# Altium PCB water_level_v3.PcbDoc
Units mil, origin at the board's own origin, x right, y up, seen from the top; angles counter-clockwise.
Board outline 4724.41 x 2755.91 mil, 2 copper layers (Top Layer, Bottom Layer), stack 62.205 mil thick; 38 components, 53 nets, 176 pads, 136 vias.
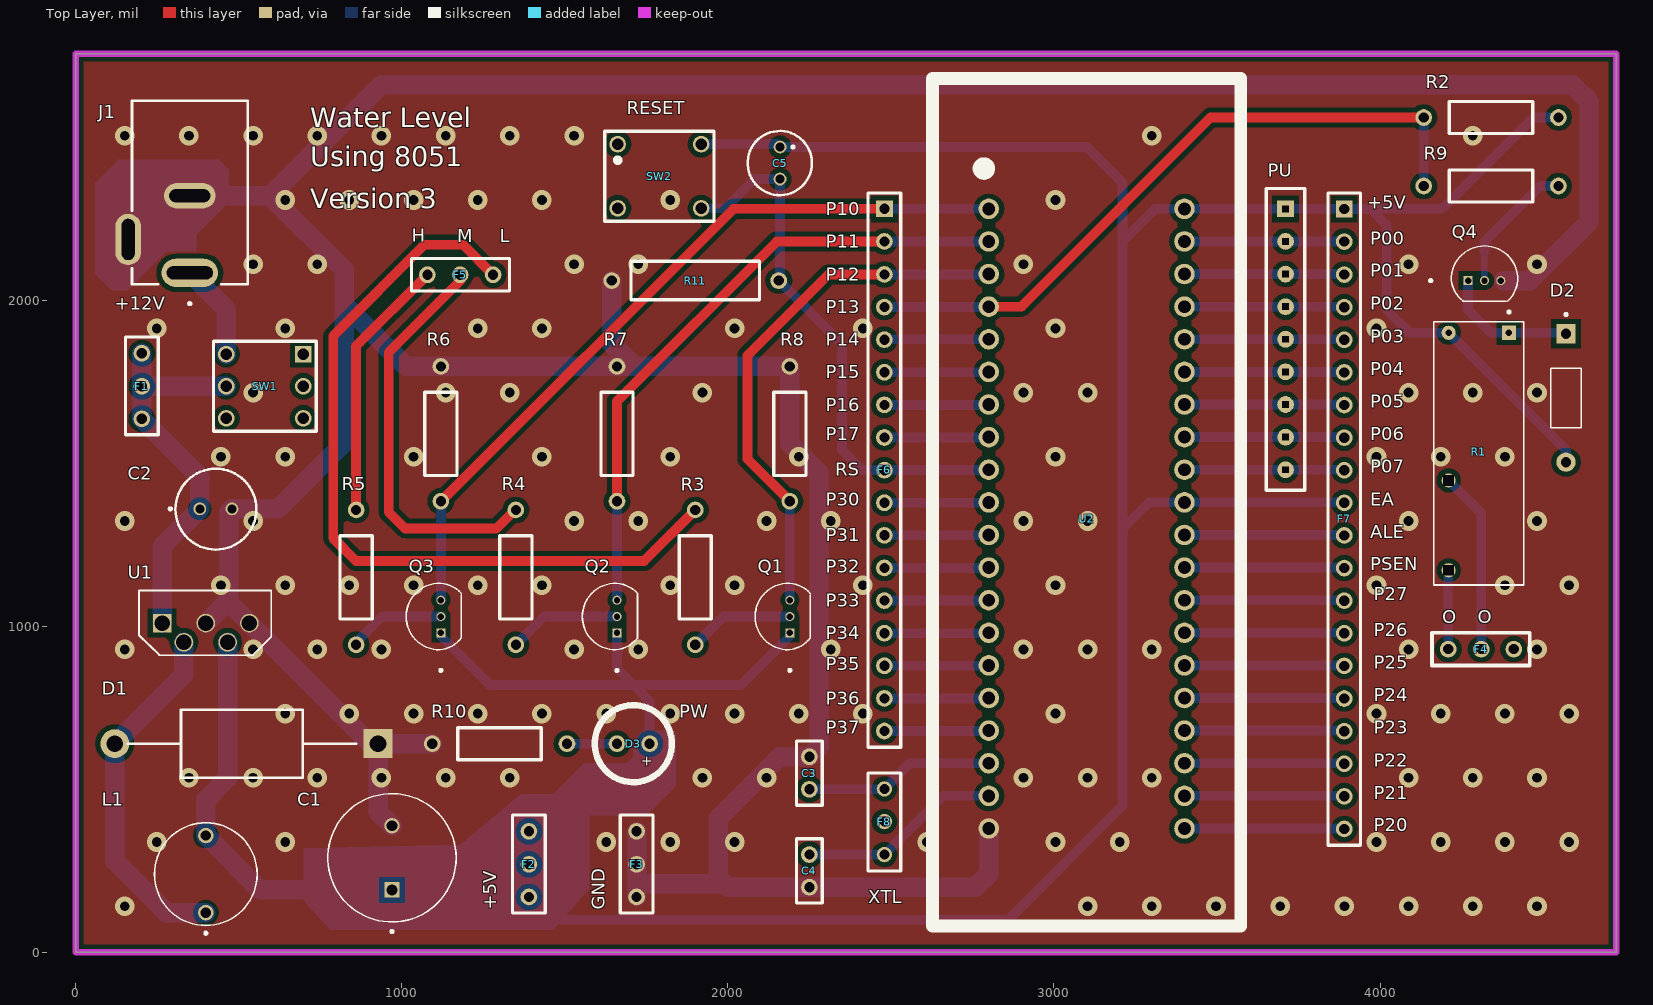
[diagram p0: Top Layer view]
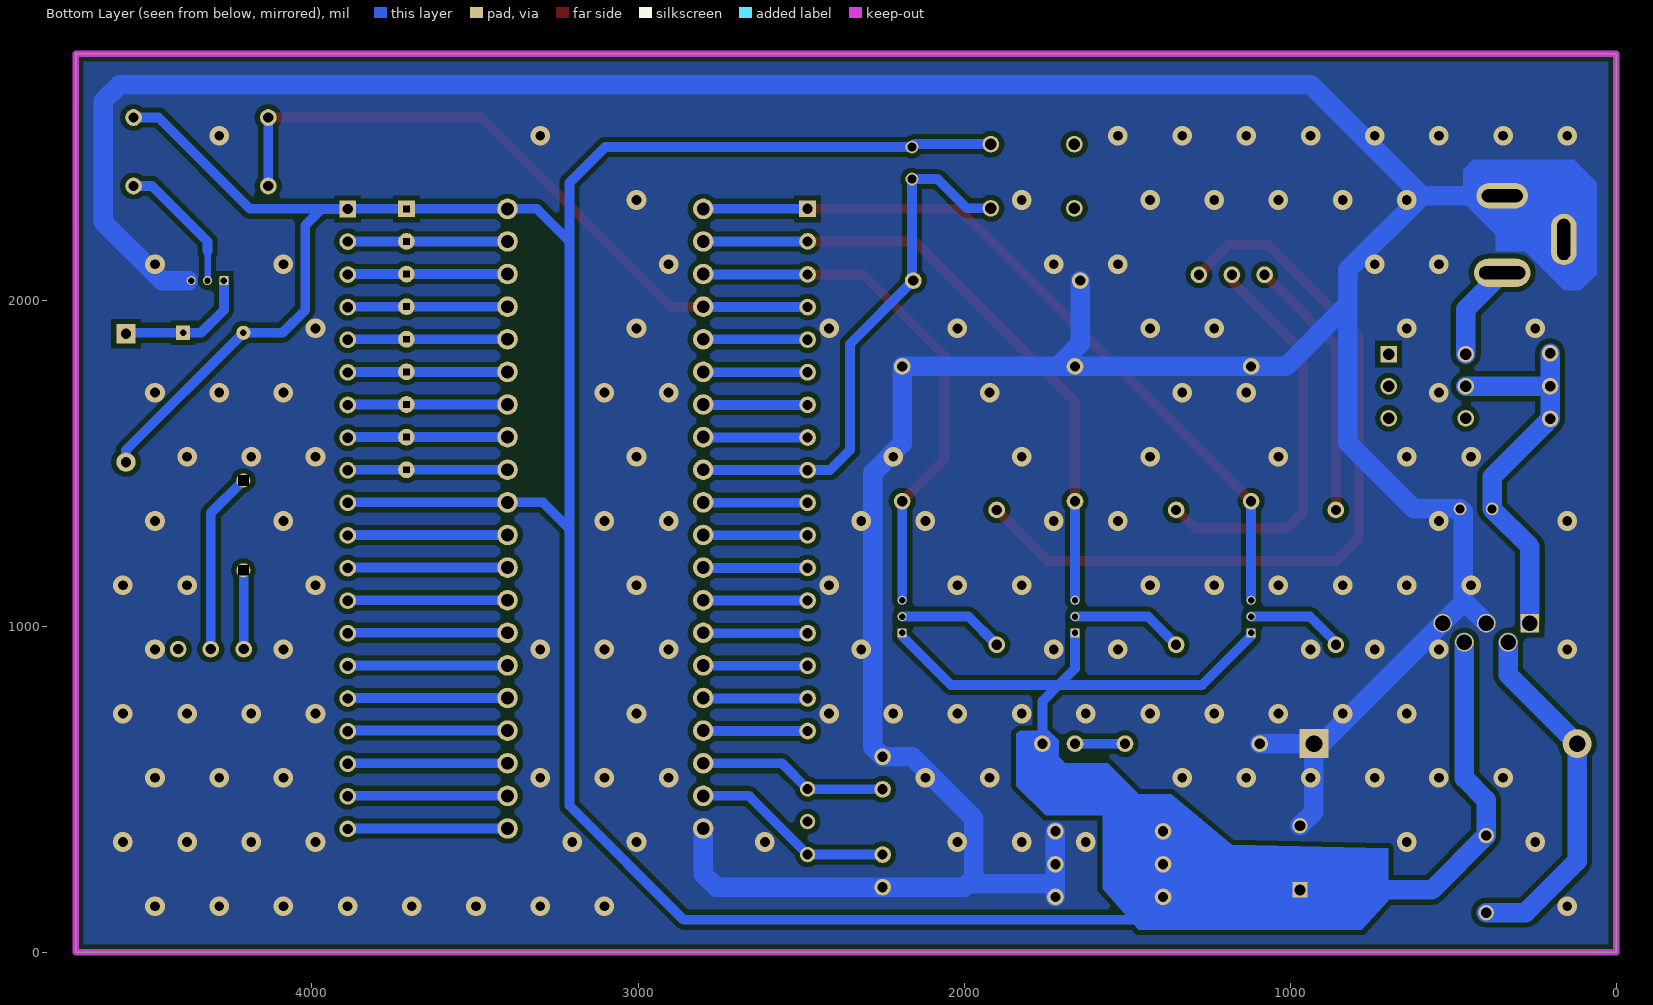
[diagram p1: Bottom Layer view, seen from below]

## Layer stack, top to bottom
Top Solder: solder mask 0.3937, Solder Resist, Dk 3.5
Top Layer: signal copper 1.378
Dielectric 1: dielectric 59.4488, FR-4, Dk 4.8
Bottom Layer: signal copper 1.378
Bottom Solder: solder mask 0.3937, Solder Resist, Dk 3.5

## Board outline
0,0 4724.41,0 4724.41,2755.91 0,2755.91

## Design rules (kind name [scope] priority, off if disabled: settings)
Clearance [All] p1: gap=15 ignorepadtopadclearanceinfootprint=FALSE except(19.68: THPad-THPad)
HoleSize [All] p1: absolutevalues=TRUE maxlimit=150 minlimit=1 maxpercent=80.000 minpercent=20.000
PolygonConnect [All] p1: connectstyle=Direct reliefconductorwidth=10 reliefentries=4 polygonreliefangle="90 Angle" airgapwidth=10
RoutingVias [All] p1: holewidth=30 width=100 viastyle="Through Hole" minholewidth=11.81 minwidth=19.68 maxholewidth=248.03 maxwidth=50
SilkToSolderMaskClearance [IsPad] p1 off: minsilkscreentomaskgap=2 clearancetoexposedcopper=TRUE
SolderMaskExpansion [All] p1: expansion=4 istentingtop=FALSE
Width [All] p1: maxlimit=70 minlimit=10 preferedwidth=60
28 further rules are at their usual default settings.

## Classes and differential pairs
component class water_level_v3: C1 C2 D1 D2 F1 F2 F3 F4 F5 J1 L1 Q1 Q2 Q3 Q4 R1 R2 R3 R4 R5 R6 R7 R8 R9 SW1 U1
component class Mcu_at89s52: C3 C4 C5 D3 F6 F7 F8 PU R10 R11 SW2 U2

## Components (designator, comment, footprint, x,y, rotation, side; value= is the part's Value field where it differs from the comment)
C1 "1000uF 25V" "Capacitor 1000uF 25V" 970,290 r90 top
C2 "100uF" "Capacitor 100uF 35V" 430,1360 r0 top
C3 "30pf" CAP_30pF 2250,550 r270 top
C4 "30pf" CAP_30pF 2250,250 r270 top
C5 "Capacitor 10uF" "Capacitor 10uF 50V" 2160,2420.43 r270 top
D1 "1N5822" "Diode 1N5822" 510,640 r180 top
D2 "1N4007" 1N4007 4570,1700 r270 top
D3 "Red" "LED - 3mm" 1710,640 r180 top
F1 "+12V_DC" "Fence 3pin" 203.07,1687.24 r90 top
F2 "+5V_DC" "Fence 3pin" 1390,221.18 r90 top
F3 "GND_" "Fence 3pin" 1720,221.18 r90 top
F4 "Fence 3 pin" "MALE HEADER 3PIN" 4358.82,930 r180 top
F5 "Pin_water" "Fence 3pin" 1130,2077.87 r0 top
F6 "Fence 17 PIN" "Fence 17PIN" 2480,1528.82 r270 top
F7 "Fence 20 pin" "Fence 20PIN" 3890,1378.48 r270 top
F8 "Fence 3 pin" "Fence 3pin_female" 2480,450 r270 top
J1 "DCJ200-10-A-XX-K_REVA" GCT_DCJ200-10-A-XX-K_REVA 350,2320 r180 top
L1 "100uH" Inductor 399.21,240 r90 top
PU "8x10kOhm" RES_10K_PACK_9PIN 3710,1880 r270 top (schematic designator RP1)
Q1 "2N2222A" 2N2222 2190,1029.8 r90 top
Q2 "2N2222A" 2N2222 1660,1029.8 r90 top
Q3 "2N2222A" 2N2222 1120,1029.8 r90 top
Q4 "2N2222A" 2N2222 4320,2060 r0 top
R1 "Relay" Relay 4302.52,1527.95 r270 top
R2 "1k" "RESISTOR 1W" 4340.2,2560 r0 top
R3 "1k" "RESISTOR 1W" 1900,1150 r270 top
R4 "1k" "RESISTOR 1W" 1350,1150 r270 top
R5 "1k" "RESISTOR 1W" 860,1150 r270 top
R6 "1k" "RESISTOR 1W" 1120,1590 r270 top
R7 "1k" "RESISTOR 1W" 1660,1590 r270 top
R8 "1k" "RESISTOR 1W" 2190,1590 r270 top
R9 "1k" "RESISTOR 1W" 4340.2,2350 r180 top
R10 "1k" "RESISTOR 1W" 1300,640 r180 top
R11 "10k" "RESISTOR 10k_0.5W" 1900,2060 r0 top
SW1 "Push_sw 8x8mm 6pin" "PUSH_SW 6PIN" 580,1736.06 r270 top
SW2 "Sw_4pin" SW_4PIN 1790,2380 r0 top
U1 "LM2576T-5V" LM2596T-5V 399.06,1009.8 r0 top
U2 "Ic_socket_40pin_2.54mm" IC_SOKET_40PIN 3100,1380 r0 top

## Footprints (in the part's own frame and the unit in brackets; to place one, negate y for a bottom-side part, rotate by r counter-clockwise, add the part's x,y. Pads: shape width x height; smd on the part's side, far side on the other; paste and mask are expansions set on the pad)
1N4007 [mm] "Diode 1N4007 1A 1000V DIP"
  rect 1.5x1.5 hole 0.8: 1(-5,0)
  round 1.5 hole 0.8: 2(5,0)
  silkscreen extent -6.6,-1.18 2.32,1.18, body extent -5.47,-1.35 5.47,1.35, height 4.19
2N2222 [mm]
  rect 0.7x0.7 hole 0.5: 1(-1.275,0)
  round 0.7 hole 0.5: 2(0,0) 3(1.275,0)
  silkscreen extent -4.29,-1.6 2.59,2.7, body extent -2.6,-1.5 2.6,2.69, height 5.33
CAP_30pF [mm] "ceramic 50V"
  round 1.3 hole 0.8: 1(-1.27,0) 2(1.27,0)
  silkscreen extent -2.5,-1 2.5,1, body extent -1.8,-1.25 1.8,1.25, height 5
"Capacitor 10uF 50V" [mm] "pin2mmd5mmx11mm"
  round 1 hole 0.7: 1(-1.25,0) 2(1.25,0)
  silkscreen extent -2.5,-2.52 2.5,2.47, body extent -2.5,-2.5 2.5,2.5, height 12
"Capacitor 100uF 35V" [mm]
  round 1 hole 0.7: 1(-1.25,0) 2(1.25,0)
  silkscreen extent -3.65,-3.17 3.15,3.12, body extent -3.15,-3.17 3.15,3.12, height 17
"Capacitor 1000uF 25V" [mm] "T? hóa 1000uF 25V / Kích thu?c 10x17mm"
  rect 1.2x1.2 hole 0.85: 1(-2.5,0)
  round 1.2 hole 0.85: 2(2.5,0)
  silkscreen extent -5.85,-5 5,5, body extent -4.99,-5 5,5, height 12.5
"Diode 1N5822" [mm] "1N5822 Diode Schottky 40V 3A DO-201AD"
  rect 2.25x2.25 hole 1.3: 1(-10.6,0)
  round 2.25 hole 1.3: 2(9.9,0)
  silkscreen extent -8.89,-2.65 8.89,2.65, body extent -10.83,-2.65 10.32,2.65, height 17
"Fence 3pin" [mm] "Hang rao male 6 chan"
  round 1.3 hole 0.8: 1(-1.3,0) 2(1.24,0) 3(3.81,0)
  silkscreen extent -2.54,-1.27 5.08,1.27, body extent -2.77,-1.27 5.17,1.3, height 9.18
"Fence 3pin_female" [mm] "Hang rao male 6 2.54mm"
  round 1.2 hole 0.8: 1(-1.3,0) 2(1.24,0) 3(3.81,0)
  silkscreen extent -2.54,-1.27 5.08,1.27, body extent -2.79,-1.23 5.33,1.27, height 5
"Fence 17PIN" [mm] "Hang rao male 20 chan"
  rect 1.3x1.3 hole 0.8: 1(-19.08,0)
  round 1.3 hole 0.8: 2(-16.54,0) 3(-13.97,0) 4(-11.43,0) 5(-8.89,0) 6(-6.35,0) 7(-3.81,0) 8(-1.27,0) 9(1.27,0) 10(3.81,0) 11(6.35,0) 12(8.89,0) 13(11.43,0) 14(13.97,0) 15(16.51,0) 16(19.05,0) 17(21.59,0)
  silkscreen extent -20.32,-1.27 22.86,1.27, body extent -20.55,-1.27 22.96,1.3, height 9.18
"Fence 20PIN" [mm] "Hang rao male 20 chan"
  rect 1.3x1.3 hole 0.8: 1(-22.89,0)
  round 1.3 hole 0.8: 2(-20.35,0) 3(-17.78,0) 4(-15.24,0) 5(-12.7,0) 6(-10.16,0) 7(-7.62,0) 8(-5.08,0) 9(-2.54,0) 10(0,0) 11(2.54,0) 12(5.08,0) 13(7.62,0) 14(10.16,0) 15(12.7,0) 16(15.24,0) 17(17.78,0) 18(20.32,0) 19(22.86,0) 20(25.4,0)
  silkscreen extent -24.13,-1.27 26.67,1.27, body extent -24.36,-1.27 26.77,1.3, height 9.18
GCT_DCJ200-10-A-XX-K_REVA [mm]
  oval 2x4 hole 1 slot 3.2 at 90 deg: 2(4.8,3.4)
  oval 4x2 hole 1 slot 3.2 at 0 deg: 3(0,0)
  oval 4.4x2.2 hole 1 slot 3.6 at 0 deg: 4(0,6)
  silkscreen extent -4.5,-7.4 4.5,8.5, body extent -4.5,-7.4 5.05,6.9, height 11
IC_SOKET_40PIN [mm] "2.54mm"
  round 1.6 hole 1: 1(-7.62,22.86) 2(-7.62,20.32) 3(-7.62,17.78) 4(-7.62,15.24) 5(-7.62,12.7) 6(-7.62,10.16) 7(-7.62,7.62) 8(-7.62,5.08) 9(-7.62,2.54) 10(-7.62,0) 11(-7.62,-2.54) 12(-7.62,-5.08) 13(-7.62,-7.62) 14(-7.62,-10.16) 15(-7.62,-12.7) 16(-7.62,-15.24) 17(-7.62,-17.78) 18(-7.62,-20.32) 19(-7.62,-22.86) 20(-7.62,-25.4) 21(7.62,-25.4) 22(7.62,-22.86) 23(7.62,-20.32) 24(7.62,-17.78) 25(7.62,-15.24) 26(7.62,-12.7) 27(7.62,-10.16) 28(7.62,-7.62) 29(7.62,-5.08) 30(7.62,-2.54) 31(7.62,0) 32(7.62,2.54) 33(7.62,5.08) 34(7.62,7.62) 35(7.62,10.16) 36(7.62,12.7) 37(7.62,15.24) 38(7.62,17.78) 39(7.62,20.32) 40(7.62,22.86)
  silkscreen extent -12,-33 12,33, body extent -8.85,-27.15 8.85,25.11, height 8.11
Inductor [mm] "Cu?n c?m 100uH 08108x10mm / Mô hình 3D ch? mang tính ch?t tu?ng trung do không tìm du?c mô hình phù h?p"
  round 1.2 hole 0.8: 1(-3,0) 2(3,0)
  silkscreen extent -4.7,-4 4,4, body extent -3.9,-7.79 4.11,7.57, height 2.01
"LED - 3mm" [mm]
  round 1.3 hole 0.8: 1(-1.27,0) 2(1.27,0)
  silkscreen extent -3,-3 3,3, body extent -1.82,-1.95 1.58,1.95, height 5.95
LM2596T-5V [mm]
  rect 1.45x1.45 hole 1.2: 1(-3.4,0)
  round 1.45 hole 1.2: 2(-1.7,-1.5) 3(0,0) 4(1.7,-1.5) 5(3.4,0)
  silkscreen extent -5.2,-2.52 5.1,2.52, body extent -5.12,-1.9 5.12,2.55, height 15.11
"MALE HEADER 3PIN" [mm] "2.54mm"
  round 1.3 hole 0.8: 1(-1.3,0) 2(1.24,0) 3(3.81,0)
  silkscreen extent -2.54,-1.27 5.08,1.27, body extent -2.77,-1.27 5.17,1.3, height 9.18
"PUSH_SW 6PIN" [mm] "8X8MM"
  rect 1.3x1.3 hole 0.9: 1(-2.5,3)
  round 1.3 hole 0.9: 2(0,3) 3(2.5,3) 4(-2.5,-3) 5(0,-3) 6(2.5,-3)
  silkscreen extent -3.5,-4 3.5,4, body extent -4,-4 4,4, height 13.6
Relay [mm] "Relay 5V5A HF46F-G 5-HS1 c?a Hongfa. / V? d?a trên HF46F/005-HS1F(610) c?a Hongfa"
  rect 1.1x1.1 hole 0.5: 1(-9.45,2.35)
  round 1.1 hole 0.5: 2(-9.45,-2.35)
  round 1.1 hole 0.8 square: 3(2.05,-2.35) 4(9.05,-2.35)
  silkscreen extent -11.17,-3.5 10.2,3.5, body extent -10.4,-3.51 10,3.5, height 14.79
RES_10K_PACK_9PIN [mm] "2.54mm"
  rect 1.3x1.3 hole 0.5 square: 1(-10.16,0)
  round 1.3 hole 0.5 square: 2(-7.62,0) 3(-5.08,0) 4(-2.54,0) 5(0,0) 6(2.54,0) 7(5.08,0) 8(7.62,0) 9(10.16,0)
  silkscreen extent -11.75,-1.5 11.75,1.5, body extent -11.5,-1.24 13.85,1.24, height 4.95
"RESISTOR 1W" [mm] "1k Ohm"
  round 1.3 hole 0.8: 1(-5.25,0) 2(5.25,0)
  silkscreen extent -3.25,-1.25 3.25,1.25, body extent -5.45,-1.2 5.35,1.2, height 3.2
"RESISTOR 10k_0.5W" [mm] "10k Ohm"
  round 1.3 hole 0.8: 1(-6.5,0) 2(6.5,0)
  silkscreen extent -5,-1.5 5,1.5, body extent -6.6,-1.5 6.6,1.5, height 3.5
SW_4PIN [mm] "6X6mm"
  round 1.3 hole 0.9: 1(-3.25,2.5) 2(3.25,2.5) 3(-3.25,-2.5) 4(3.25,-2.5)
  silkscreen extent -4.25,-3.5 4.25,3.5, body extent -3.78,-2.76 3.78,3.25, height 6

## Part data
C1: library part "Capacitor 1000uF 25V", "T? hóa 1000uF 25V / Kích thu?c 10x17mm", Package=None, Availability=Unavailable, MF="{'manufacturer': u'Panasonic'}", MP=EEUTA1V101, Price=None
C2: library part "Capacitor 100uF", "T? hóa 100uF 35V"
C3 C4: library part "Capacitor 33pf", "T? hóa 33pf 50V"
C5: "T? hóa 10uF 55V"
D1: library part "Diode 1N5822", "1N5822 Diode Schottky 40V 3A DO-201AD / (Through hole)"
D2: "Diode 1N4007 1A 1000V DIP"
D3: library part LED, "LED 5mm"
F1 F2 F3 F5: library part "Fence 3 pin", "hàng rào male 6 chân"
F4 F8: "hàng rào male 6 chân"
J1: "Power Barrel Connector Jack 2.05mm ID (0.081), 5.50mm OD (0.217) Through Hole, Right Angle", Package=None, Check_prices=https://www.snapeda.com/parts/DCJ200-10-A-K1-K/Global+Connector+Technology/view-part/?ref=eda, MF="Global Connector Technology", MP=DCJ200-10-A-K1-K, SnapEDA_Link=https://www.snapeda.com/parts/DCJ200-10-A-K1-K/Global+Connector+Technology/view-part/?ref=snap
L1: library part Inductor, "Cu?n c?m 100uH 0810 8x15mm"
PU: library part Resistor_pack_9pin
Q1 Q2 Q3 Q4: Package=None, Availability=Unavailable, MF="{'manufacturer': u'Diotec Semiconductor'}", MP=2N2222A, Price=None
R1: "Relay 5V5A HF46F-G 5-HS1 c?a Hongfa. / V? d?a trên HF46F/005-HS1F(610) c?a Hongfa"
R2 R3 R4 R5 R6 R7 R8 R9 R10 R11: library part Resistor, "dien tro"
SW1: "6pin free 1-3.4-6 push 2-3,4-5"
U1: library part LM2596T-5V, "IC, STEP-DOWN VOLTAGE REGULATOR", Package=None, Availability=Unavailable, MF="{'manufacturer': u'Texas Instruments'}", MP=LM2596T-12, Price=None

## Via types
v1: diameter 60, hole 30, Top Layer to Bottom Layer, tented both sides, 136 vias

## Nets (pads, with @x,y where several pads share a name; then routed paths per layer and width w, separated by ;. In a path a pad name is that pad's centre, name@x,y a point inside that pad or via, vN(x,y) a via of type N, cw(c..) or ccw(c..) an arc to the next point about the centre after c; other vN are vias at no path point)
+5V: C1.1 C5.1 D2.2 D3.1 F2.1 F2.2 F2.3 F7.1 F7.10 L1.2 PU.1 Q1.1 Q2.1 Q3.1 R1.2 R2.2 SW2.2 U1.4 U2.31 U2.40 | length 11433.5
  Bottom Layer w30: Q3.1 1120,970 1270,820 1710,820 ; 1440,100 1505,100 2860,100 3210,450 3210,1298.82 ; 1440,430 1450,440 ; Q2.1 1660,870 1710,820 ; D3.1@1750,650 D3.1 1760,770 1710,820 ; SW2.2 2151.22,2478.43 C5.1 3100.35,2469.65 3210,2360 3210,2180 ; Q1.1 2190,970 2040,820 1710,820 ; F7.10 3888.48,1380 U2.31 3291.18,1380 3210,1298.82 ; R2.2 4470,2560 4190,2280 F7.1@3889.66,2280 ; D2.2 4570,1540 R1.2 4090,1900 4020,1970 4020,2230 3970.34,2279.66 F7.1 F7.1@3889.66,2280 ; 3210,1298.82 3210,2180 ; 3210,2180 3310,2280 U2.40 PU.1 F7.1@3889.66,2280
  Bottom Layer w60: U1.4 465.98,534.09 399.21,467.32 L1.2 565.75,191.57 C1.1
+12V: C2.1 F1.1 F1.2 F1.3 SW1.5 U1.1 | length 1207.8
  Bottom Layer w60: F1.3 F1.2 ; U1.1 265.2,1244.41 C2.1 380.79,1458.35 F1.1 F1.2 ; SW1.5 F1.2
ALE: F7.11 U2.30 | length 490.6
  Bottom Layer w30: U2.30 3888.48,1280 F7.11
GND: C1.2 C2.2 C3.1 C4.2 D1.1 F3.1 F3.2 F3.3 J1.2 J1.3 Q4.3 R6.1 R7.1 R8.1 R10.2 R11.1 U1.3 U1.5 U2.20 | length 12873.4
  Bottom Layer w60: J1.3 596.69,2320 ; U1.3 470,1080.75 470,1350.79 C2.2 620,1360 823.94,1563.94 823.94,1986.06 ; 479.21,1063.5 U1.5 902.72,640 D1.1 ; C1.2 927.32,431.1 D1.1 ; R10.2 D1.1 ; R11.1 1644.09,1865.91 1710,1800 1710,1796.69 ; F3.1 1720,200 ; F3.3 F3.2 1720,200 ; U2.20 2800,240 2760,200 C4.2 2000,200 1990,210 ; Q4.3@4378.78,2060 4460,2060 4640,2240 4640,2610 4590,2660 936.69,2660 596.69,2320 ; 596.69,2320 823.94,2092.76 823.94,1986.06 ; 823.94,1986.06 1013.31,1796.69 R6.1 R7.1 1710,1796.69 ; 1710,1796.69 R8.1 2190,1560 2280,1470 2280,630 C3.1 2160,600 1970,410 1970,230 1990,210 ; 1720,200 1730,210 1990,210
  other v1: 150.35,141.65 3103.11,141.65 3299.96,141.65 3496.81,141.65 3693.66,141.65 3890.51,141.65 4087.36,141.65 4284.21,141.65 4481.06,141.65 248.78,338.5 642.48,338.5 1626.73,338.5 1823.58,338.5 2020.43,338.5 2610.98,338.5 3004.69,338.5 3201.54,338.5 3988.94,338.5 4185.79,338.5 4382.64,338.5 4579.49,338.5 347.2,535.35 544.06,535.35 740.91,535.35 937.76,535.35 1134.61,535.35 1331.46,535.35 1922.01,535.35 2118.86,535.35 2906.26,535.35 3103.11,535.35 3299.96,535.35 4087.36,535.35 4284.21,535.35 4481.06,535.35 642.48,732.2 839.33,732.2 1036.18,732.2 1233.03,732.2 1429.88,732.2 1626.73,732.2 1823.58,732.2 2020.43,732.2 2217.28,732.2 2414.13,732.2 3004.69,732.2 3988.94,732.2 4185.79,732.2 4382.64,732.2 4579.49,732.2 150.35,929.06 544.06,929.06 740.91,929.06 937.76,929.06 1528.31,929.06 1725.16,929.06 2315.71,929.06 2906.26,929.06 3103.11,929.06 3299.96,929.06 4087.36,929.06 4481.06,929.06 445.63,1125.91 642.48,1125.91 839.33,1125.91 1036.18,1125.91 1233.03,1125.91 1429.88,1125.91 1823.58,1125.91 2020.43,1125.91 2414.13,1125.91 3004.69,1125.91 3988.94,1125.91 4382.64,1125.91 4579.49,1125.91 150.35,1322.76 544.06,1322.76 1528.31,1322.76 1725.16,1322.76 2118.86,1322.76 2315.71,1322.76 2906.26,1322.76 3103.11,1322.76 4087.36,1322.76 4481.06,1322.76 445.63,1519.61 642.48,1519.61 1036.18,1519.61 1429.88,1519.61 1823.58,1519.61 2217.28,1519.61 3004.69,1519.61 3988.94,1519.61 4185.79,1519.61 4382.64,1519.61 544.06,1716.46 1134.61,1716.46 1331.46,1716.46 1922.01,1716.46 2906.26,1716.46 3103.11,1716.46 4087.36,1716.46 4284.21,1716.46 4481.06,1716.46 248.78,1913.31 642.48,1913.31 1233.03,1913.31 1429.88,1913.31 2020.43,1913.31 2414.13,1913.31 3004.69,1913.31 3988.94,1913.31 544.06,2110.16 740.91,2110.16 1528.31,2110.16 1725.16,2110.16 2906.26,2110.16 4087.36,2110.16 4481.06,2110.16 642.48,2307.01 839.33,2307.01 1036.18,2307.01 1233.03,2307.01 1429.88,2307.01 1823.58,2307.01 3004.69,2307.01 150.35,2503.86 347.2,2503.86 544.06,2503.86 740.91,2503.86 937.76,2503.86 1134.61,2503.86 1331.46,2503.86 1528.31,2503.86 3299.96,2503.86 4284.21,2503.86
NetC3_2: C3.2 F8.1 U2.18 | length 583.1
  Bottom Layer w30: C3.2 2478.82,500 F8.1 2558.82,580 U2.18
NetC4_1: C4.1 F8.3 U2.19 | length 624.6
  Bottom Layer w30: C4.1 F8.3 2660,480 U2.19
NetD1_2: D1.2 L1.1 U1.2 | length 1103.1
  Bottom Layer w60: U1.2 332.13,851.89 D1.2 120.24,279.76 278.11,121.89 L1.1
NetD2_1: D2.1 Q4.1 R1.1 | length 420.4
  Bottom Layer w30: Q4.1 4269.8,1970.2 4340,1900 R1.1 4566.85,1900 D2.1
NetD3_2: D3.2 R10.1 | length 153.3
  Bottom Layer w30: R10.1 D3.2
NetF5_1: F5.1 R5.1 | length 820.9
  Top Layer w30: R5.1 860,1859.06 F5.1 F5.1@1078.82,2068.82
NetF5_2: F5.2 R4.1 | length 1252.7
  Top Layer w30: F5.2 1178.82,2058.82 960,1840 960,1350 1010,1300 1290,1300 1346.69,1356.69 R4.1
NetF5_3: F5.3 R3.1 | length 2468
  Top Layer w30: F5.3 1187.87,2170 1070,2170 790,1890 790,1270 860,1200 1743.31,1200 R3.1
NetJ1_4: J1.4 SW1.4 | length 295.6
  Bottom Layer w60: J1.4 461.89,1971.89 SW1.4
NetQ1_2: Q1.2 R3.2 | length 325.8
  Bottom Layer w30: R3.2 1986.5,1029.8 Q1.2
NetQ2_2: Q2.2 R4.2 | length 345.8
  Bottom Layer w30: R4.2 1436.5,1029.8 Q2.2
NetQ3_2: Q3.2 R5.2 | length 299.7
  Bottom Layer w30: R5.2 860,950 939.8,1029.8 Q3.2
NetQ4_2: Q4.2 R9.1 | length 417.1
  Bottom Layer w20: Q4.2 4320,2150
  Bottom Layer w30: 4320,2150 4320,2179.66 4490.34,2350 R9.1
P00: F7.2 PU.2 U2.39 | length 503.8
  Bottom Layer w30: U2.39 PU.2 F7.2@3880.34,2180 ; F7.2 3889.66,2180 F7.2@3880.34,2180 ; F7.2@3890,2189.66 F7.2@3880.34,2180
P01: F7.3 PU.3 U2.38 | length 502.6
  Bottom Layer w30: U2.38 PU.3 F7.3@3881.52,2080 ; F7.3 3888.48,2080 F7.3@3881.52,2080 ; F7.3@3890,2088.48 F7.3@3881.52,2080
P02: F7.4 PU.4 U2.37 | length 502.6
  Bottom Layer w30: U2.37 PU.4 F7.4@3881.52,1980 ; F7.4 3888.48,1980 F7.4@3881.52,1980 ; F7.4@3890,1988.48 F7.4@3881.52,1980
P03: F7.5 PU.5 U2.36 | length 490.6
  Bottom Layer w30: U2.36 PU.5 3888.48,1880 F7.5
P04: F7.6 PU.6 U2.35 | length 502.6
  Bottom Layer w30: U2.35 PU.6 F7.6@3881.52,1780 ; F7.6 3888.48,1780 F7.6@3881.52,1780 ; F7.6@3890,1788.48 F7.6@3881.52,1780
P05: F7.7 PU.7 U2.34 | length 490.6
  Bottom Layer w30: U2.34 PU.7 3888.48,1680 F7.7
P06: F7.8 PU.8 U2.33 | length 490.6
  Bottom Layer w30: U2.33 PU.8 3888.48,1580 F7.8
P07: F7.9 PU.9 U2.32 | length 490.6
  Bottom Layer w30: U2.32 PU.9 3888.48,1480 F7.9
P10: F6.1 Q3.3 R6.2 U2.1 | length 2354.7
  Top Layer w30: R6.2 2016.69,2280 F6.1
  Bottom Layer w30: Q3.3 R6.2 ; F6.1 U2.1
P11: F6.2 Q2.3 R7.2 U2.2 | length 1953
  Top Layer w30: R7.2 1660,1690 2150,2180 F6.2
  Bottom Layer w30: Q2.3 R7.2 ; F6.2 U2.2
P12: F6.3 Q1.3 R8.2 U2.3 | length 1647.4
  Top Layer w30: R8.2 2060,1513.31 2060,1830 2308.82,2078.82 F6.3
  Bottom Layer w30: Q1.3 R8.2 ; F6.3 2798.82,2078.82 U2.3
P13: F6.4 R2.1 R9.2 U2.4 | length 2104.2
  Top Layer w30: U2.4 2900,1980 3480,2560 R2.1
  Bottom Layer w30: F6.4 2798.82,1978.82 U2.4 ; R9.2 R2.1
P14: F6.5 U2.5 | length 320.5
  Bottom Layer w30: F6.5 2481.18,1880 U2.5
P15: F6.6 U2.6 | length 320.5
  Bottom Layer w30: F6.6 2798.82,1778.82 U2.6
P16: F6.7 U2.7 | length 320.5
  Bottom Layer w30: F6.7 2798.82,1678.82 U2.7
P17: F6.8 U2.8 | length 320.5
  Bottom Layer w30: F6.8 2798.82,1578.82 U2.8
P20: F7.20 U2.21 | length 490.6
  Bottom Layer w30: U2.21 3888.48,380 F7.20
P21: F7.19 U2.22 | length 490.6
  Bottom Layer w30: U2.22 3888.48,480 F7.19
P22: F7.18 U2.23 | length 490.6
  Bottom Layer w30: U2.23 3888.48,580 F7.18
P23: F7.17 U2.24 | length 490.6
  Bottom Layer w30: U2.24 3888.48,680 F7.17
P24: F7.16 U2.25 | length 490.6
  Bottom Layer w30: U2.25 3888.48,780 F7.16
P25: F7.15 U2.26 | length 490.6
  Bottom Layer w30: U2.26 3888.48,880 F7.15
P26: F7.14 U2.27 | length 490.6
  Bottom Layer w30: U2.27 3888.48,980 F7.14
P27: F7.13 U2.28 | length 490.6
  Bottom Layer w30: U2.28 3888.48,1080 F7.13
P30: F6.10 U2.10 | length 320.5
  Bottom Layer w30: F6.10 2798.82,1378.82 U2.10
P31: F6.11 U2.11 | length 320.5
  Bottom Layer w30: F6.11 2798.82,1278.82 U2.11
P32: F6.12 U2.12 | length 320.5
  Bottom Layer w30: F6.12 2798.82,1178.82 U2.12
P33: F6.13 U2.13 | length 320.5
  Bottom Layer w30: F6.13 2798.82,1078.82 U2.13
P34: F6.14 U2.14 | length 320.5
  Bottom Layer w30: F6.14 2798.82,978.82 U2.14
P35: F6.15 U2.15 | length 320.5
  Bottom Layer w30: F6.15 2798.82,878.82 U2.15
P36: F6.16 U2.16 | length 320.5
  Bottom Layer w30: F6.16 2798.82,778.82 U2.16
P37: F6.17 U2.17 | length 320.5
  Bottom Layer w30: F6.17 2798.82,678.82 U2.17
PSEN: F7.12 U2.29 | length 490.6
  Bottom Layer w30: U2.29 3888.48,1180 F7.12
relay+: F4.2 R1.3 | length 558.7
  Bottom Layer w30: R1.3 4310,1347.24 F4.2
relay-: F4.3 R1.4 | length 242.1
  Bottom Layer w30: F4.3 4208.82,1170.47 R1.4
RESET: C5.2 F6.9 R11.2 SW2.4 U2.9 | length 1668.3
  Bottom Layer w30: SW2.4 1991.57,2281.57 2081.22,2371.22 C5.2 2160,2064.09 R11.2 2350,1865.91 2350,1540 2411.18,1478.82 F6.9 2798.82,1478.82 U2.9
pads on no net: F4.1 F8.2 SW1.1 SW1.2 SW1.3 SW1.6 SW2.1 SW2.3

## Polygon pours and split planes (outlines as drawn)
GND on Bottom Layer "GND_L02_P004" (solid, remove dead copper, pour order 4): 0,0 4724.41,0 4724.41,2755.91 0,2755.91
GND on Top Layer "GND_L01_P006" (solid, remove dead copper, pour order 6): 0,0 4724.41,0 4724.41,2755.91 0,2755.91

## Keep-outs
Keep-Out Layer:
  the board outline again, w20

## Other copper
Bottom Layer:
  region net +5V: 1830,680 1840,670 1840,510 1750,420 1460,420 1460,480 1560,580 1690,580 1710,600 1710,650 1740,680
  region net +5V: 1540,485 1575,450 1575,195 1465.15,68.67 780,68.67 700,158.11 700,320 1180,330 1365,485
  region net GND: 465.98,2300 470,2304.02 470,2400 440,2430 130,2430 60,2360 60,2080 110,2030 160,2030 280,2150 370,2150 370,2200 470,2300

## Silkscreen, mask and mechanical layers (free items; w line width, h text height)
Top Overlay:
  text "RESET" at 1690,2570 h40
  text "Water Level" at 720,2530 h60
  text "Using 8051" at 720,2410 h60
  text "Version 3" at 720,2281.57 h60
  text "+5V" at 3960,2280 h40
  text "P10" at 2300,2260 h40
  text "H" at 1030,2178.66 h40
  text "M" at 1170,2177.87 h40
  text "L" at 1300,2177.87 h40
  text "P00" at 3970,2170 h40
  text "P11" at 2300,2160 h40
  text "P01" at 3970,2071.3 h40
  text "P12" at 2300,2060 h40
  text "+12V" at 120.24,1970 h40
  text "P02" at 3970,1970 h40
  text "P13" at 2300,1960 h40
  text "P03" at 3970,1870 h40
  text "P14" at 2300,1860 h40
  text "P04" at 3970,1770 h40
  text "P15" at 2300,1760 h40
  text "P05" at 3970,1670 h40
  text "P16" at 2300,1660 h40
  text "P17" at 2300,1570 h40
  text "P06" at 3970,1570 h40
  text "P07" at 3970,1470 h40
  text "RS" at 2330,1462.05 h40
  text "P30" at 2300,1370 h40
  text "EA" at 3970,1370 h40
  text "ALE" at 3970,1270 h40
  text "P31" at 2300,1260 h40
  text "PSEN" at 3970,1171.65 h40
  text "P32" at 2300,1164.8 h40
  text "P27" at 3980,1080 h40
  text "P33" at 2300,1060 h40
  text "O" at 4190,1010 h40
  text "O" at 4300,1009.8 h40
  text "P26" at 3980,970 h40
  text "P34" at 2300,960 h40
  text "P25" at 3980,870 h40
  text "P35" at 2300,864.88 h40
  text "P24" at 3980,770 h40
  text "P36" at 2300,760 h40
  text "PW" at 1850.79,720 h40
  text "P37" at 2300,670 h40
  text "P23" at 3980,670 h40
  text "P22" at 3980,570 h40
  text "P21" at 3980,470 h40
  text "P20" at 3980,371.18 h40
  text "XTL" at 2430,150 h40
  text "+5V" at 1290,130 h40 r90
  text "GND" at 1622.79,130 h40 r90

## Text inside footprints (layer, text, board x,y; h text height)
D3: Top Overlay "+" at 1769.06,600.63 h31.5 r180